# Altium PCB Musa_pcbdogtag.PcbDoc
Units mm, origin at the board's own origin, x right, y up, seen from the top; angles counter-clockwise.
Board outline 60 x 30 mm, 2 copper layers (Top Layer, Bottom Layer), stack 1.671 mm thick; 5 components, 4 nets, 20 pads, 0 vias.
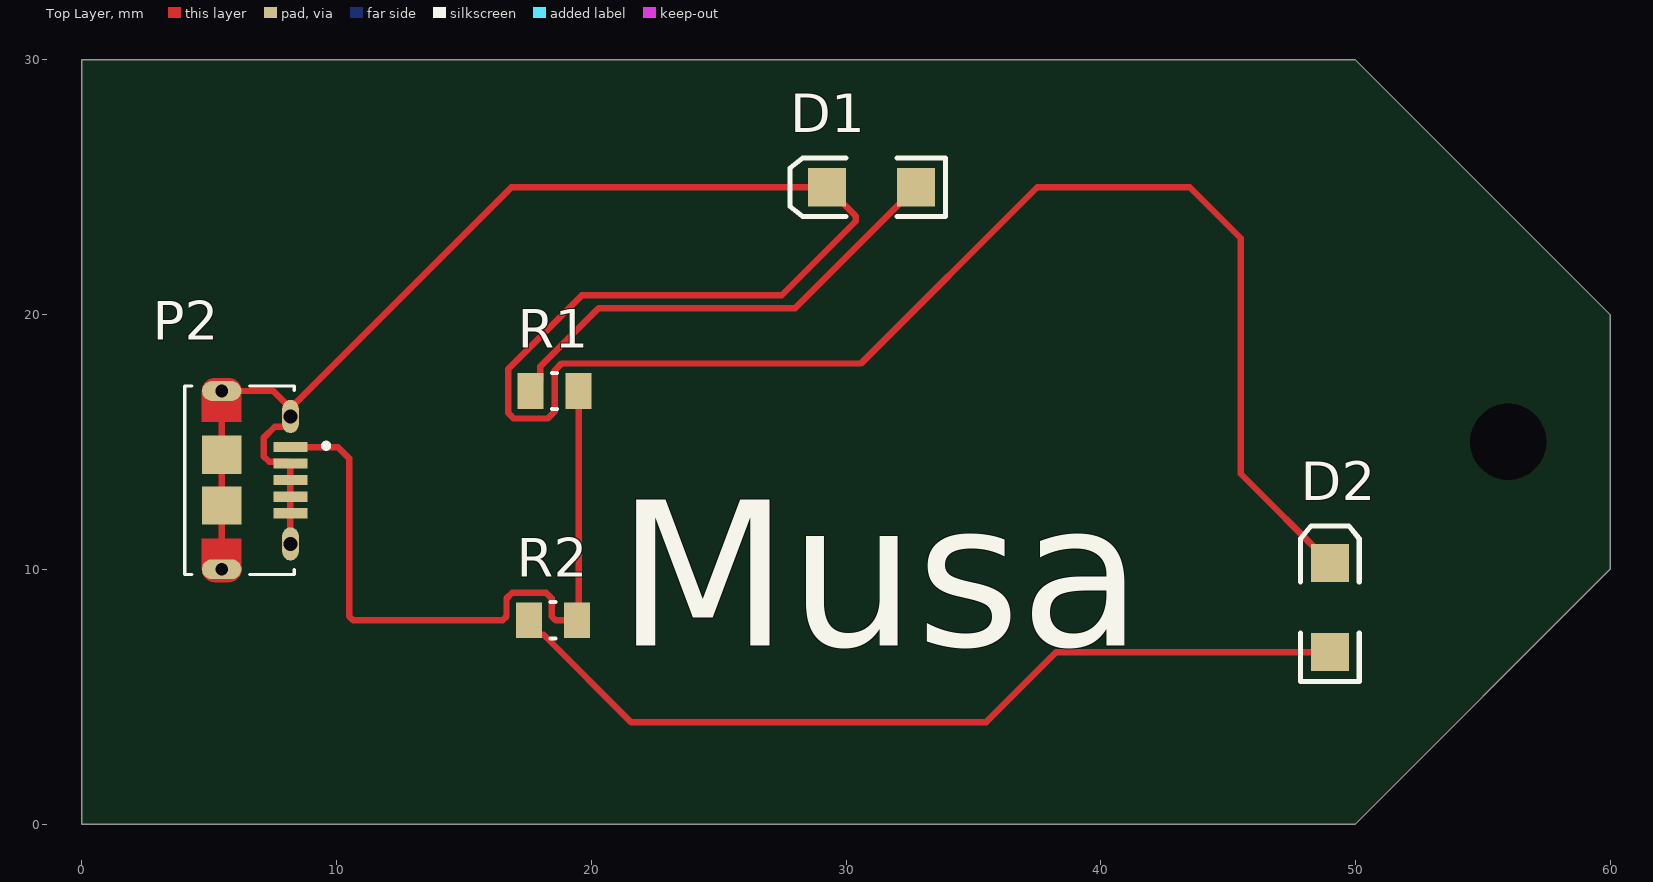
[diagram p0: Top Layer view]
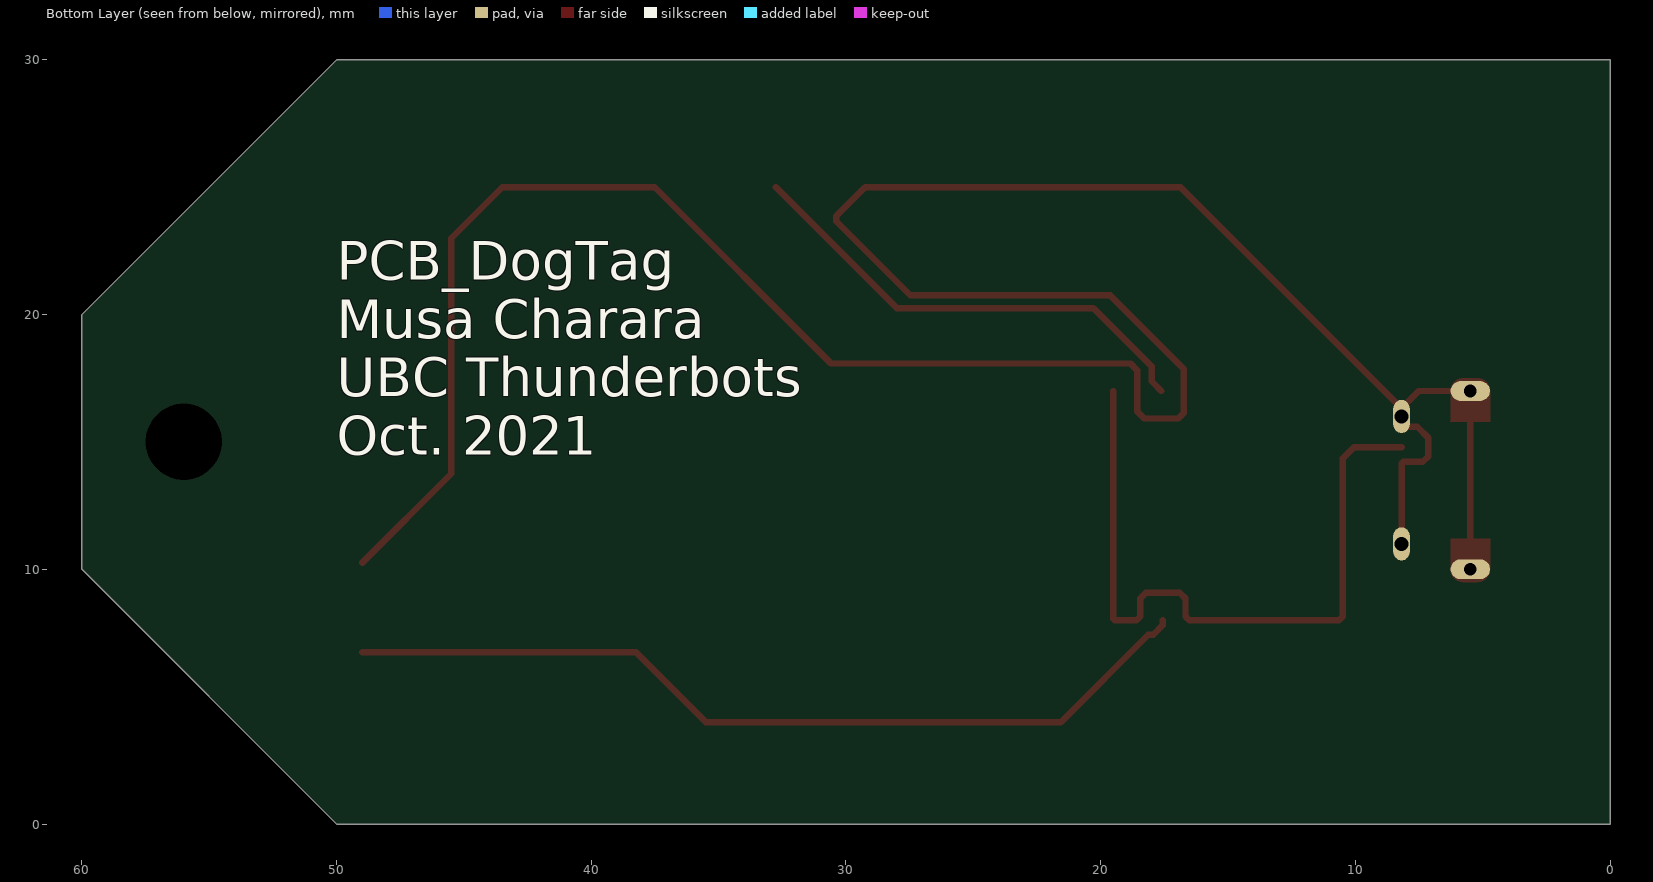
[diagram p1: Bottom Layer view, seen from below]

## Layer stack, top to bottom
Top Solder: solder mask 0.0102, Solder Resist, Dk 3.5
Top Layer: signal copper 0.0356
Dielectric 1: dielectric 1.6, FR-4, Dk 4.8
Bottom Layer: signal copper 0.0356
Bottom Solder: solder mask 0.0102, Solder Resist, Dk 3.5

## Board outline
0,30 50,30 60,20 60,10 50,0 0,0

## Design rules (kind name [scope] priority, off if disabled: settings)
Clearance [All] p1: gap=0.254 ignorepadtopadclearanceinfootprint=FALSE except(0: Arc-Hole Track-Hole SMDPad-Hole THPad-Hole Via-Hole Fill-Hole Poly-Hole Region-Hole Text-Hole)
PolygonConnect [All] p1: connectstyle=Relief reliefconductorwidth=0.254 reliefentries=4 polygonreliefangle="90 Angle" airgapwidth=0.254
RoomDefinition Musa_Schematic [InComponentClass('Musa_Schematic')] p1: confinementstyle=ConfineIn formatcopy=TRUE lockcomponents=FALSE outline -11.5,-6.5 73,-6.5 73,36 -11.5,36
RoutingVias [All] p1: holewidth=0.711 width=1.27 viastyle="Through Hole" minholewidth=0.711 minwidth=1.27 maxholewidth=0.711 maxwidth=1.27
SolderMaskExpansion [All] p1: expansion=0.102 istentingtop=FALSE
Width [All] p1: maxlimit=0.254 minlimit=0.254 preferedwidth=0.254
30 further rules are at their usual default settings.

## Components (designator, comment, footprint, x,y, rotation, side; value= is the part's Value field where it differs from the comment)
D1 "LED2" 3.2X1.6X1.1 31,25 r180 top
D2 "LED2" 3.2X1.6X1.1 49,8.5 r90 top
P2 "10118194-0001LF" "USB Micro B Receptacle" 5.5,13.5 r270 top
R1 "240" 0805 18.56,17 r0 top
R2 "240" 0805 18.5,8 r0 top

## Footprints (in the part's own frame and the unit in brackets; to place one, negate y for a bottom-side part, rotate by r counter-clockwise, add the part's x,y. Pads: shape width x height; smd on the part's side, far side on the other; paste and mask are expansions set on the pad)
3.2X1.6X1.1 [mm]
  rect 1.5x1.5 smd: 1(-1.75,0) 2(1.75,0)
  silkscreen extent -2.9,-1.15 3.2,1.15
0805 [mil]
  rect 40x55 smd: 1(-37,0) 2(37,0)
  silkscreen extent -4,-28 4,28, body extent -47,-28 47,28, height 24
"USB Micro B Receptacle" [mm] "CONN RCPT USB2.0 MICRO B SMD R/A"
  rect 0.4x1.35 smd: 1(-1.3,2.69) 2(-0.65,2.69) 3(0,2.69) 4(0.65,2.69) 5(1.3,2.69)
  oval 1.3x0.65 hole 0.55: S1(-2.5,2.69) S2(2.5,2.69)
  oval 0.775x1.55 hole 0.5: S3(-3.5,-0.01) S6(3.5,-0.01)
  rect 1.5x1.55 smd: S4(-1,-0.01) S5(1,-0.01)
  Top Layer region: 194 vertices and 0 holes, not listed, extent -4,-0.785 -2.3,0.77
  Top Layer region: 194 vertices and 0 holes, not listed, extent 2.3,-0.79 4,0.765
  silkscreen extent -3.7,-1.46 3.7,4.19, body extent -4,-2.74 4.04,2.79, height 2.87

## Part data
D1 D2: library part "LED RED SMD", "Typical RED, GREEN, YELLOW, AMBER GaAs LED", Color=Red, Current - Test=20mA, Lens Color=Colorless, Package=1206, Voltage - Forward (Vf) (Typ)=1.7V, Lens Transparency=Clear
P2: library part "USB Micro B Receptacle", "USB - micro B USB 2.0 Receptacle Connector 5 Position Surface Mount, Right Angle; Through Hole", Rating="100VAC 1.8A", ComponentLink1Description=Digikey, ComponentLink1URL=https://www.digikey.ca/product-detail/en/amphenol-icc-fci/10118194-0001LF/609-4618-1-ND/2785382, ComponentLink2Description=Datasheet, ComponentLink2URL=https://www.digikey.ca/en/datasheets/amphenol-fci/amphenol-fci-io-usb-micro, Digikey=609-4618-1-ND, Digikey Link=https://www.digikey.ca/product-detail/en/amphenol-icc-fci/10118194-0001LF/609-4618-1-ND/2785382, MF="Amphenol ICC (FCI)", MP=10118194-0001LF, Price="0.62000 CAD"
R1 R2: library part "RES 240.0 1/8W", "RES SMD 240 OHM 5% 1/8W 0805", Package=0805, Power (Watts)=0.125W, Tolerance=5%

## Free pads (board coordinates)
  round 1.524 hole 3: 1(56,15)

## Nets (pads, with @x,y where several pads share a name; then routed paths per layer and width w, separated by ;. In a path a pad name is that pad's centre, name@x,y a point inside that pad or via, vN(x,y) a via of type N, cw(c..) or ccw(c..) an arc to the next point about the centre after c; other vN are vias at no path point)
GND: D1.2 D2.2 P2.2 P2.3 P2.4 P2.5 P2.S1 P2.S2 P2.S3 P2.S4 P2.S5 P2.S6 | length 109.7
  Top Layer w0.254: P2.S6 P2.S5 P2.S4 P2.S3 7.515,17 P2.S1@8.19,16.325 ; P2.S2 P2.5 P2.4 P2.3 P2.2 8.121,14.219 7.357,14.219 7.134,14.442 7.134,15.158 7.575,15.599 8.007,15.599 8.19,15.782 P2.S1 P2.S1@8.19,16.325 ; D2.2 45.5,13.75 45.5,23 43.5,25 37.506,25 30.585,18.079 18.834,18.079 18.56,17.806 18.56,16.194 18.286,15.92 16.955,15.92 16.731,16.144 16.731,17.856 19.633,20.757 27.48,20.757 30.381,23.659 30.381,23.869 D1.2 16.865,25 P2.S1@8.19,16.325
NetD1_1: D1.1 R1.1 | length 18.8
  Top Layer w0.254: R1.1 18.001,17.381 18.001,17.965 20.286,20.249 27.999,20.249 D1.1
NetD2_1: D2.1 R2.1 | length 34.3
  Top Layer w0.254: R2.1 17.56,7.809 17.941,7.428 18.132,7.428 21.56,4 35.5,4 38.25,6.75 D2.1
NetP2_1: P2.1 R1.2 R2.2 | length 28.4
  Top Layer w0.254: P2.1 10.051,14.8 10.5,14.351 10.5,8.149 10.649,8 16.522,8 16.671,8.149 16.671,8.856 16.894,9.079 18.226,9.079 18.449,8.856 18.449,8.149 18.598,8 R2.2 19.5,8.06 R1.2

## Silkscreen, mask and mechanical layers (free items; w line width, h text height)
Top Overlay:
  text "Musa" at 21,7 h6
Bottom Overlay:
  text "PCB_DogTag / Musa Charara / UBC Thunderbots / Oct. 2021" at 50,14.5 h1.52

## Text inside footprints (layer, text, board x,y; h text height)
P2: Mechanical 13 "PCB END" at 3.14,15.45 h1.88 r270; Mechanical 13 "PCB END" at 3.14,15.45 h1.88 r270